# Altium PCB PCB1.PcbDoc
Units mil, origin at the board's own origin, x right, y up, seen from the top; angles counter-clockwise.
Board outline 6000 x 4000 mil, 2 copper layers (Top Layer, Bottom Layer); 56 components, 59 nets, 244 pads, 0 vias.
Unrouted connection lines stored in the file: 165.
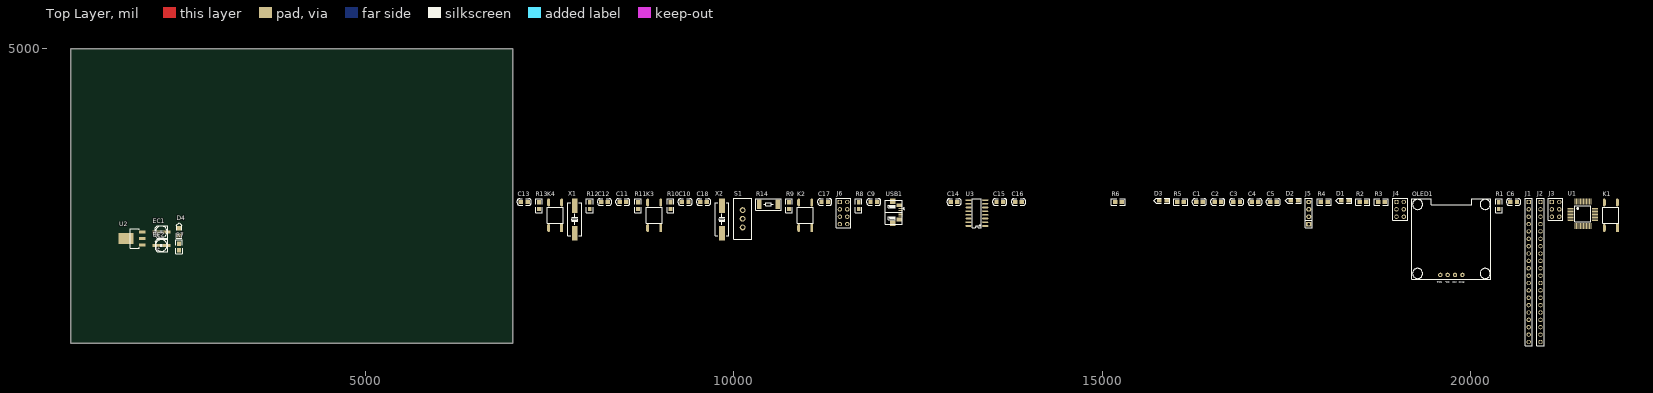
[diagram p0: Top Layer view]
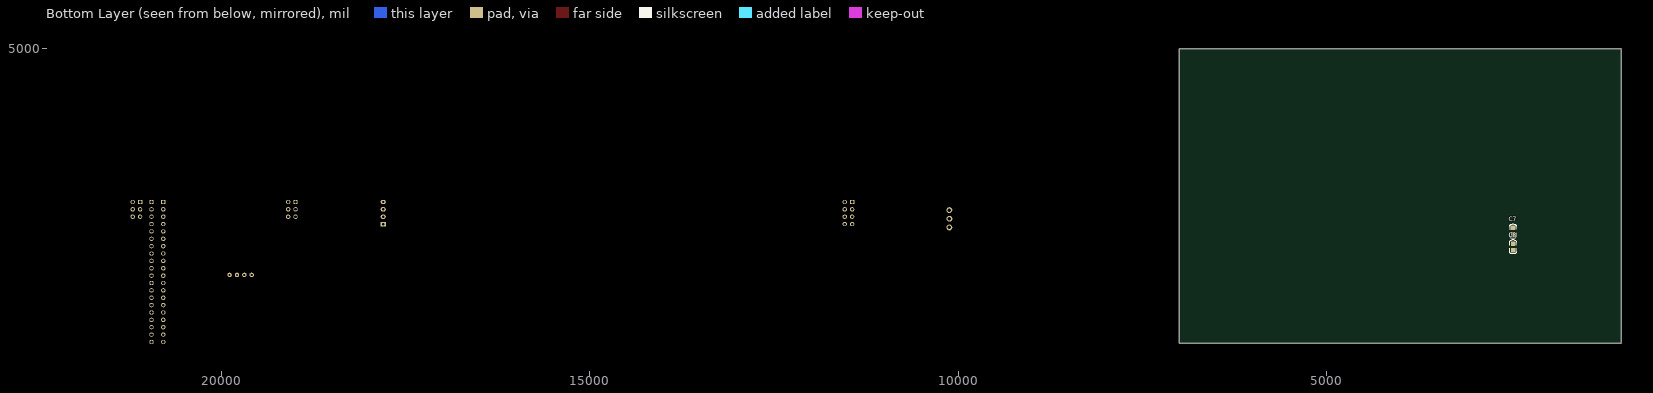
[diagram p1: Bottom Layer view, seen from below]

## Layer stack, top to bottom
Top Solder: solder mask 0.4, Solder Resist, Dk 3.5
Top Layer: signal copper 1.4
Dielectric 1: dielectric 12.6, FR-4, Dk 4.8
Bottom Layer: signal copper 1.4
Bottom Solder: solder mask 0.4, Solder Resist, Dk 3.5

## Board outline
1000,1000 7000,1000 7000,5000 1000,5000

## Design rules (kind name [scope] priority, off if disabled: settings)
Clearance [All] p1: gap=6 ignorepadtopadclearanceinfootprint=FALSE
PolygonConnect [All] p1: connectstyle=Direct reliefconductorwidth=10 reliefentries=4 polygonreliefangle="90 Angle" airgapwidth=10
RoutingVias [All] p1: holewidth=28 width=50 viastyle="Through Hole" minholewidth=28 minwidth=50 maxholewidth=28 maxwidth=50
SolderMaskExpansion [All] p1: expansion=4 istentingtop=FALSE
Width GND [InNet('GND')] p1: maxlimit=30 minlimit=10 preferedwidth=20
Width +5V0 [InNet('+5V0')] p2: maxlimit=30 minlimit=10 preferedwidth=20
Width +3V3 [InNet('+3V3')] p3: maxlimit=30 minlimit=10 preferedwidth=20
Width [All] p4: maxlimit=20 minlimit=10 preferedwidth=10
30 further rules are at their usual default settings.

## Components (designator, comment, footprint, x,y, rotation, side; value= is the part's Value field where it differs from the comment)
C1 "CAP" 0805C 16365,2920 r180 top
C2 "CAP" 0805C 16615,2920 r180 top
C3 "CAP" 0805C 16870,2920 r180 top
C4 "CAP" 0805C 17120,2920 r180 top
C5 "CAP" 0805C 17370,2920 r180 top
C6 "104" 0805C 20630,2920 r180 top
C7 "104" 0805C 2470,2480 r90 bottom
C8 "104" 0805C 2470,2265 r90 bottom
C9 "104" 0805C 11945,2920 r180 top
C10 "104" 0805C 9385,2920 r180 top
C11 "200" 0805C 8540,2920 r180 top
C12 "104" 0805C 8290,2920 r180 top
C13 "200" 0805C 7200,2920 r180 top
C14 "104" 0805C 13035,2920 r180 top
C15 "106" 0805C 13655,2920 r180 top
C16 "104" 0805C 13910,2920 r180 top
C17 "200" 0805C 11280,2920 r180 top
C18 "200" 0805C 9635,2920 r180 top
D1 "LED" LED-0805R 18345,2935 r180 top
D2 "LED" LED-0805G 17660,2935 r180 top
D3 "LED" LED-0805B 15875,2935 r180 top
D4 "LED" LED-0805B 2470,2465 r90 top
EC1 "106" SMD-EC4.0X4.3X5.4 2159.1,2515 r0 top
EC2 "106" SMD-EC4.0X4.3X5.4 2159.1,2330 r0 top
J1 "Pin HDR1X20" "Pin HDR1X20/2.54mm-S" 20790,2920 r270 top
J2 "Pin HDR1X20" "Pin HDR1X20/2.54mm-S" 20950,2920 r270 top
J3 "Pin HDR2X3" "Pin HDR2X3/2.54mm-S" 21105,2920 r270 top
J4 "Pin HDR2X3" "Pin HDR2X3/2.54mm-S" 18995,2920 r270 top
J5 "Pin HDR1X4" "Pin HDR1X4/2.54mm-S" 17805,2620 r180 top
J6 "ESP8266" Fe-HDR2X4/2.54-S 11440,2920 r270 top
K1 "KEY" SMD-6X6X5 21990,2570 r180 top
K2 "KEY" SMD-6X6X5 11055,2570 r180 top
K3 "KEY" SMD-6X6X5 9005,2570 r180 top
K4 "KEY" SMD-6X6X5 7660,2570 r180 top
OLED1 "OLED_0.96" OLED_0.96 19890,1930 r180 top
R1 "4.7kΩ" 0805R 20385,2915 r270 top
R2 "10kΩ" 0805R 18585,2920 r180 top
R3 "10kΩ" 0805R 18835,2920 r180 top
R4 "220Ω" 0805R 18060,2920 r180 top
R5 "220Ω" 0805R 16110,2920 r180 top
R6 "220Ω" 0805R 15265,2920 r180 top
R7 "220Ω" 0805R 2470,2265 r90 top
R8 "4.7kΩ" 0805R 11695,2915 r270 top
R9 "4.7kΩ" 0805R 10750,2915 r270 top
R10 "4.7kΩ" 0805R 9140,2915 r270 top
R11 "4.7kΩ" 0805R 8700,2915 r270 top
R12 "4.7kΩ" 0805R 8045,2915 r270 top
R13 "4.7kΩ" 0805R 7355,2915 r270 top
R14 "10Ω" 2512R 10595,2890 r180 top
S1 "SS-12D10" SS-12D10 10120,2810 r270 top
U1 "STM32F103C8T6" "LQFP48 7X7" 21525,2760 r270 top
U2 "AMS1117" SOT223 1970,2425 r90 top
U3 "CH340G" SOP16 13415,2595 r180 top
USB1 "Micro-USB" USB-MICRO_A 12260,2830 r270 top
X1 "8MHz" "OSC HC-49SMD" 7840,2685 r270 top
X2 "12MHz" "OSC HC-49SMD" 9840,2685 r270 top

## Footprints (in the part's own frame and the unit in brackets; to place one, negate y for a bottom-side part, rotate by r counter-clockwise, add the part's x,y. Pads: shape width x height; smd on the part's side, far side on the other; paste and mask are expansions set on the pad)
0805C [mil]
  rect 60x50 smd: 1(-0.71,-0.4) 2(89.29,-0.4)
  silkscreen extent -51,-45 139,45, body extent 6,-25 84,25, height 31
0805R [mil]
  rect 60x50 smd: 1(0,0) 2(90,0)
  silkscreen extent -50,-45 140,45, body extent 1,-25 80,25, height 15
2512R [mil]
  rect 61x129.92 smd: 1(-3.11,2) 2(251.89,2)
  silkscreen extent -47,-77 296,81, body extent 0,-63 249,63, height 24
Fe-HDR2X4/2.54-S [mm] "Connector; Header; 4x2 Position"
  rect 1.5x1.5 hole 0.9: 1(0,0)
  round 1.5 hole 0.9: 2(0,2.54) 3(2.54,0) 4(2.54,2.54) 5(5.08,0) 6(5.08,2.54) 7(7.62,0) 8(7.62,2.54)
  silkscreen extent -1.27,-1.27 8.89,3.81, body extent -1.27,-1.23 9.14,3.77, height 8.5
LED-0805B [mil]
  rect 60x50 smd: A(0,0) K(100,0)
  silkscreen extent -40,-35 175,35, body extent 10,-25 89,25, height 32
LED-0805G [mil]
  rect 60x50 smd: A(0,0) K(100,0)
  silkscreen extent -40,-35 175,35, body extent 11,-24 89,25, height 32
LED-0805R [mil]
  rect 60x50 smd: A(0,0) K(100,0)
  silkscreen extent -40,-35 175,35, body extent 11,-24 89,25, height 32
"LQFP48 7X7" [mm]
  oval 0.3x2.1 smd: 1(-2.75,-4.227) 2(-2.25,-4.227) 3(-1.75,-4.227) 4(-1.25,-4.227) 5(-0.75,-4.227) 6(-0.25,-4.227) 7(0.25,-4.227) 8(0.75,-4.227) 9(1.25,-4.227) 10(1.75,-4.227) 11(2.25,-4.227) 12(2.75,-4.227) 25(2.75,4.202) 26(2.25,4.202) 27(1.75,4.202) 28(1.25,4.202) 29(0.75,4.202) 30(0.25,4.202) 31(-0.25,4.202) 32(-0.75,4.202) 33(-1.25,4.202) 34(-1.75,4.202) 35(-2.25,4.202) 36(-2.75,4.202)
  oval 2.1x0.3 smd: 13(4.227,-2.75) 14(4.227,-2.25) 15(4.227,-1.75) 16(4.227,-1.25) 17(4.227,-0.75) 18(4.227,-0.25) 19(4.227,0.25) 20(4.227,0.75) 21(4.227,1.25) 22(4.227,1.75) 23(4.227,2.25) 24(4.227,2.75) 37(-4.227,2.75) 38(-4.227,2.25) 39(-4.227,1.75) 40(-4.227,1.25) 41(-4.227,0.75) 42(-4.227,0.25) 43(-4.227,-0.25) 44(-4.227,-0.75) 45(-4.227,-1.25) 46(-4.227,-1.75) 47(-4.227,-2.25) 48(-4.227,-2.75)
  silkscreen extent -2.79,-2.79 2.79,2.79, body extent -4.51,-4.5 4.5,4.5, height 1.45
OLED_0.96 [mil]
  round 60 hole 30: 1(0,0) 2(100,0) 3(200,0) 4(300,0)
  silkscreen extent -387,-1035 687,59, body extent -376,-1012 676,85, height 530
"OSC HC-49SMD" [mm]
  rect 5x2 smd: 1(-4.75,0) 2(4.75,0)
  silkscreen extent -5.7,-2.4 5.7,2.4, body extent -6.37,-2.41 6.63,2.24, height 4.63
"Pin HDR1X4/2.54mm-S" [mil]
  rect 70x60 hole 32: 1(0,0)
  oval 70x60 hole 32: 2(0,-100) 3(0,-200) 4(0,-300)
  silkscreen extent -50,-350 50,50, body extent -50,-350 50,50, height 336
"Pin HDR1X20/2.54mm-S" [mm]
  rect 1.5x1.5 hole 0.9: 1(0,0)
  round 1.5 hole 0.9: 2(2.54,0) 3(5.08,0) 4(7.62,0) 5(10.16,0) 6(12.7,0) 7(15.24,0) 8(17.78,0) 9(20.32,0) 10(22.86,0) 11(25.4,0) 12(27.94,0) 13(30.48,0) 14(33.02,0) 15(35.56,0) 16(38.1,0) 17(40.64,0) 18(43.18,0) 19(45.72,0) 20(48.26,0)
  silkscreen extent -1.27,-1.27 49.53,1.27, body extent -1.27,-1.27 49.53,1.27, height 7.58
"Pin HDR2X3/2.54mm-S" [mm] "Connector; Header; 3x2 Position"
  rect 1.5x1.5 hole 0.9: 1(0,0)
  round 1.5 hole 0.9: 2(0,2.54) 3(2.54,0) 4(2.54,2.54) 5(5.08,0) 6(5.08,2.54)
  silkscreen extent -1.27,-1.27 6.35,3.81, body extent -1.27,-1.27 6.35,3.81, height 7.58
SMD-6X6X5 [mm]
  rect 1x2.7 smd: 1(-0.08,0.082)
  oval 1x2.7 smd: 2(4.42,0.082) 3(-0.08,-8.718) 4(4.42,-8.718)
  silkscreen extent -0.63,-7.11 4.95,-1.52, body extent -0.79,-8.82 5.21,0.18, height 4.95
SMD-EC4.0X4.3X5.4 [mm]
  rect 2.6x1 smd: 1(0,0) 2(3.579,0)
  silkscreen extent -0.36,-2.15 3.94,2.15, body extent -0.52,-2.15 4.08,2.15, height 5.4
SOP16 [mm]
  oval 2.1x0.6 smd: 1(0.046,0) 2(0.046,-1.27) 3(0.046,-2.54) 4(0.046,-3.81) 5(0.046,-5.08) 6(0.046,-6.35) 7(0.046,-7.62) 8(0.046,-8.89) 9(5.796,-8.89) 10(5.796,-7.62) 11(5.796,-6.35) 12(5.796,-5.08) 13(5.796,-3.81) 14(5.796,-2.54) 15(5.796,-1.27) 16(5.796,0)
  silkscreen extent 1.4,-9.45 4.45,0.56, body extent -0.15,-9.47 5.85,0.53, height 1.9
SOT223 [mil]
  rect 40x90 smd: 1(-90,0) 2(0,0) 3(90,0)
  rect 150x200 smd: 2(0,220)
  silkscreen extent -130,43 130,163, body extent -130,-30 126,246, height 65
SS-12D10 [mm]
  round 2 hole 1.2: 1(0,0) 2(3,0) 3(6,0)
  silkscreen extent -4,-3.1 10,3.1, body extent -3.95,-3.15 10.05,3.05, height 9.65
USB-MICRO_A [mm]
  rect 1.9x1.9 smd: 0(-2.515,-2.667) 0(5.08,-2.667)
  rect 0.4x1.4 smd: 1(0,0) 2(0.648,0) 3(1.295,0) 4(1.943,0) 5(2.591,0)
  rect 1.25x2 smd: 5(-1.168,-0.33) 5(3.759,-0.33)
  silkscreen extent -2.84,-5.24 5.41,1.4, body extent -2.71,-5.08 5.25,0.34, height 2.69

## Part data
C1 C2 C3 C4 C5: "无极性电容"
C6 C7 C8 C9 C10 C11 C12 C13 C14 C15 C16 C17 C18: library part CAP, "无极性电容"
EC1 EC2: library part SMD_ECAP, "贴片电解电容"
J6: library part "Female HDR2X4"
R1 R2 R3 R4 R5 R6 R7 R8 R9 R10 R11 R12 R13 R14: library part RES
U2: "三端稳压芯片"
X1 X2: library part XTAL-2P, "2脚无源脚晶振"

## Nets (pads, with @x,y where several pads share a name; then routed paths per layer and width w, separated by ;. In a path a pad name is that pad's centre, name@x,y a point inside that pad or via, vN(x,y) a via of type N, cw(c..) or ccw(c..) an arc to the next point about the centre after c; other vN are vias at no path point)
+3V3: C1.2 C2.2 C3.2 C4.2 C5.2 C8.2 C9.2 C10.2 C12.2 EC2.1 J1.1 J2.1 J3.1 J3.2 J4.1 J4.2 J5.4 J6.4 J6.7 K2.3 K3.3 K4.3 OLED1.2 R1.1 R4.1 R5.1 R6.1 R7.1 U1.9 U1.24 U1.36 U1.48 U2.2
+5V0: C7.1 C15.1 C16.1 EC1.1 J3.5 J3.6 S1.3 U2.3 U3.16
BOOT0: R2.1 U1.44
BOOT1: J1.18 R3.2 U1.20
GND: C1.1 C2.1 C3.1 C4.1 C5.1 C6.2 C7.2 C8.1 C11.1 C13.1 C14.2 C15.2 C16.2 C17.1 C18.1 D4.K EC1.2 EC2.2 J1.2 J1.3 J2.2 J2.3 J3.3 J3.4 J4.5 J4.6 J5.1 J6.2 K1.3 OLED1.1 R8.1 R10.1 R12.1 U1.8 U1.23 U1.35 U1.47 U2.1 U3.1 USB1.5
JTCK: J5.3 U1.37
JTMS: J5.2 U1.34
NetC9_1: C9.1 K2.1 R8.2 R9.2
NetC10_1: C10.1 K3.1 R10.2 R11.2
NetC12_1: C12.1 K4.1 R12.2 R13.2
NetC14_1: C14.1 U3.4
NetC17_2: C17.2 U3.7 X2.2
NetC18_2: C18.2 U3.8 X2.1
NetD1_A: D1.A R4.2
NetD2_A: D2.A R5.2
NetD3_A: D3.A R6.2
NetD4_A: D4.A R7.2
NetJ4_3: J4.3 R2.2
NetJ4_4: J4.4 R3.1
NetR14_1: R14.1 S1.2
NetR14_2: R14.2 USB1.1
NetU3_5: U3.5 USB1.3
NetU3_6: U3.6 USB1.2
NRST: C6.1 K1.1 R1.2 U1.7
OSC_IN: C11.2 U1.5 X1.2
OSC_OUT: C13.2 U1.6 X1.1
PA0: D1.K J1.8 U1.10
PA1: D2.K J1.9 U1.11
PA2: D3.K J1.10 J6.8 U1.12
PA3: J1.11 J6.1 U1.13
PA4: J1.12 U1.14
PA5: J1.13 U1.15
PA6: J1.14 U1.16
PA7: J1.15 U1.17
PA8: J2.16 U1.29
PA9: J2.15 U1.30
PA10: J2.14 U1.31 U3.2
PA11: J2.13 U1.32 U3.3
PA12: J2.12 U1.33
PA15: J2.11 U1.38
PB0: J1.16 U1.18
PB1: J1.17 U1.19
PB3: J2.10 R9.1 U1.39
PB4: J2.9 J6.3 U1.40
PB5: J2.8 J6.5 U1.41
PB6: J2.7 OLED1.4 U1.42
PB7: J2.6 OLED1.3 U1.43
PB8: J2.5 R11.1 U1.45
PB9: J2.4 R13.1 U1.46
PB10: J1.19 U1.21
PB11: J1.20 U1.22
PB12: J2.20 U1.25
PB13: J2.19 U1.26
PB14: J2.18 U1.27
PB15: J2.17 U1.28
PC13: J1.5 U1.2
PC14: J1.6 U1.3
PC15: J1.7 U1.4
VBAT: J1.4 U1.1
pads on no net: J6.6 K1.2 K1.4 K2.2 K2.4 K3.2 K3.4 K4.2 K4.4 S1.1 U3.9 U3.10 U3.11 U3.12 U3.13 U3.14 U3.15 USB1.0 USB1.4

## Text inside footprints (layer, text, board x,y; h text height)
EC1: Top Overlay "+" at 2173.68,2457.52 h39.37
EC2: Top Overlay "+" at 2173.68,2272.52 h39.37
OLED1: Top Overlay "SDA" at 19616.49,1844.09 h23.62 r180; Top Overlay "SCL" at 19716.49,1844.09 h23.62 r180; Top Overlay "VCC" at 19821.49,1844.09 h23.62 r180; Top Overlay "GND" at 19921.49,1844.09 h23.62 r180